# Altium PCB Armado del Programador Xilinx.PcbDoc
Units mm, origin at the board's own origin, x right, y up, seen from the top; angles counter-clockwise.
Board outline 439.29 x 273.69 mm, 2 copper layers (Top Layer, Bottom Layer); 34 components, 31 nets, 132 pads, 0 vias.
Unrouted connection lines stored in the file: 1.
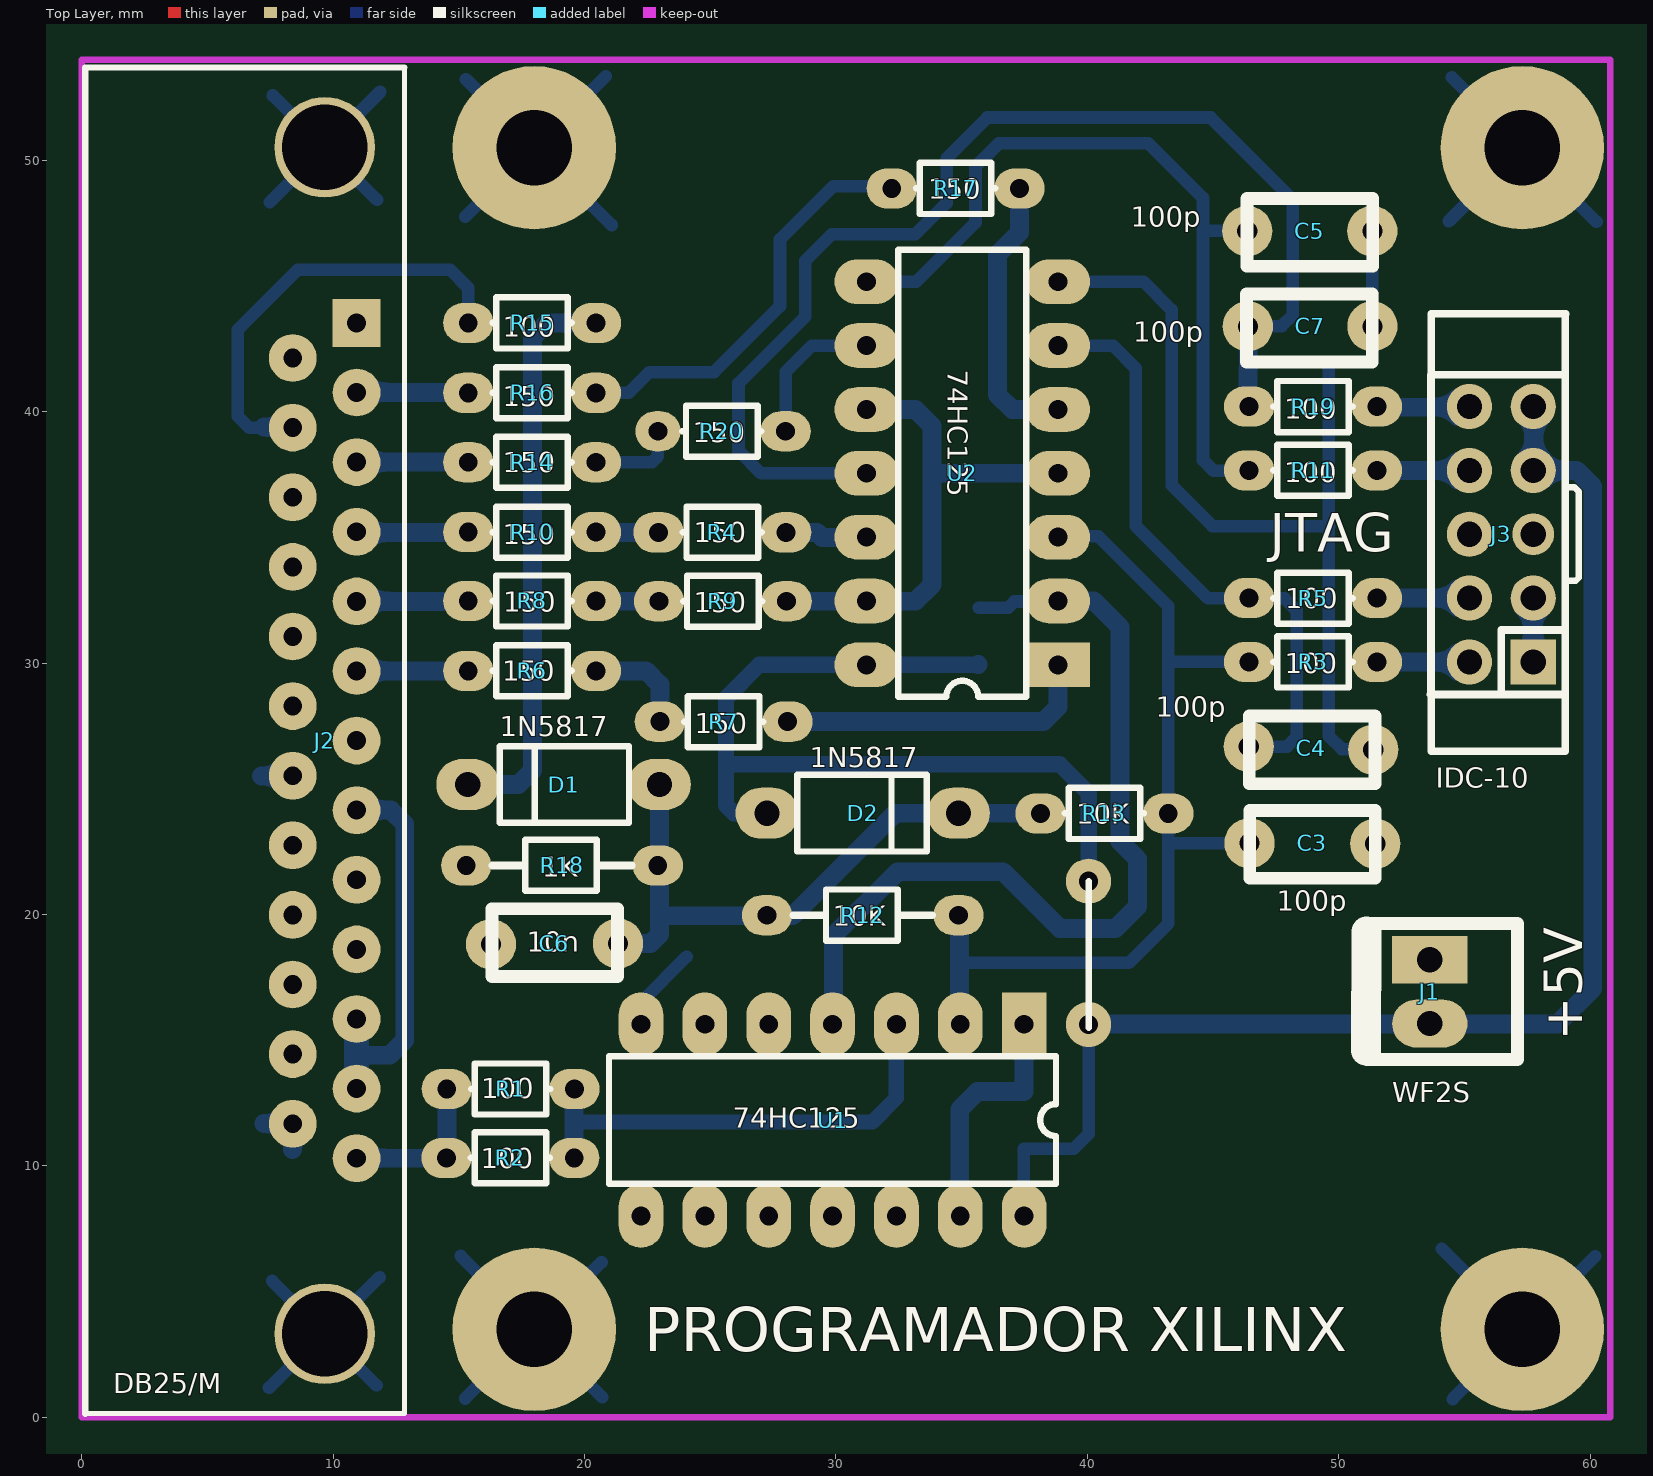
[diagram p0: Top Layer view]
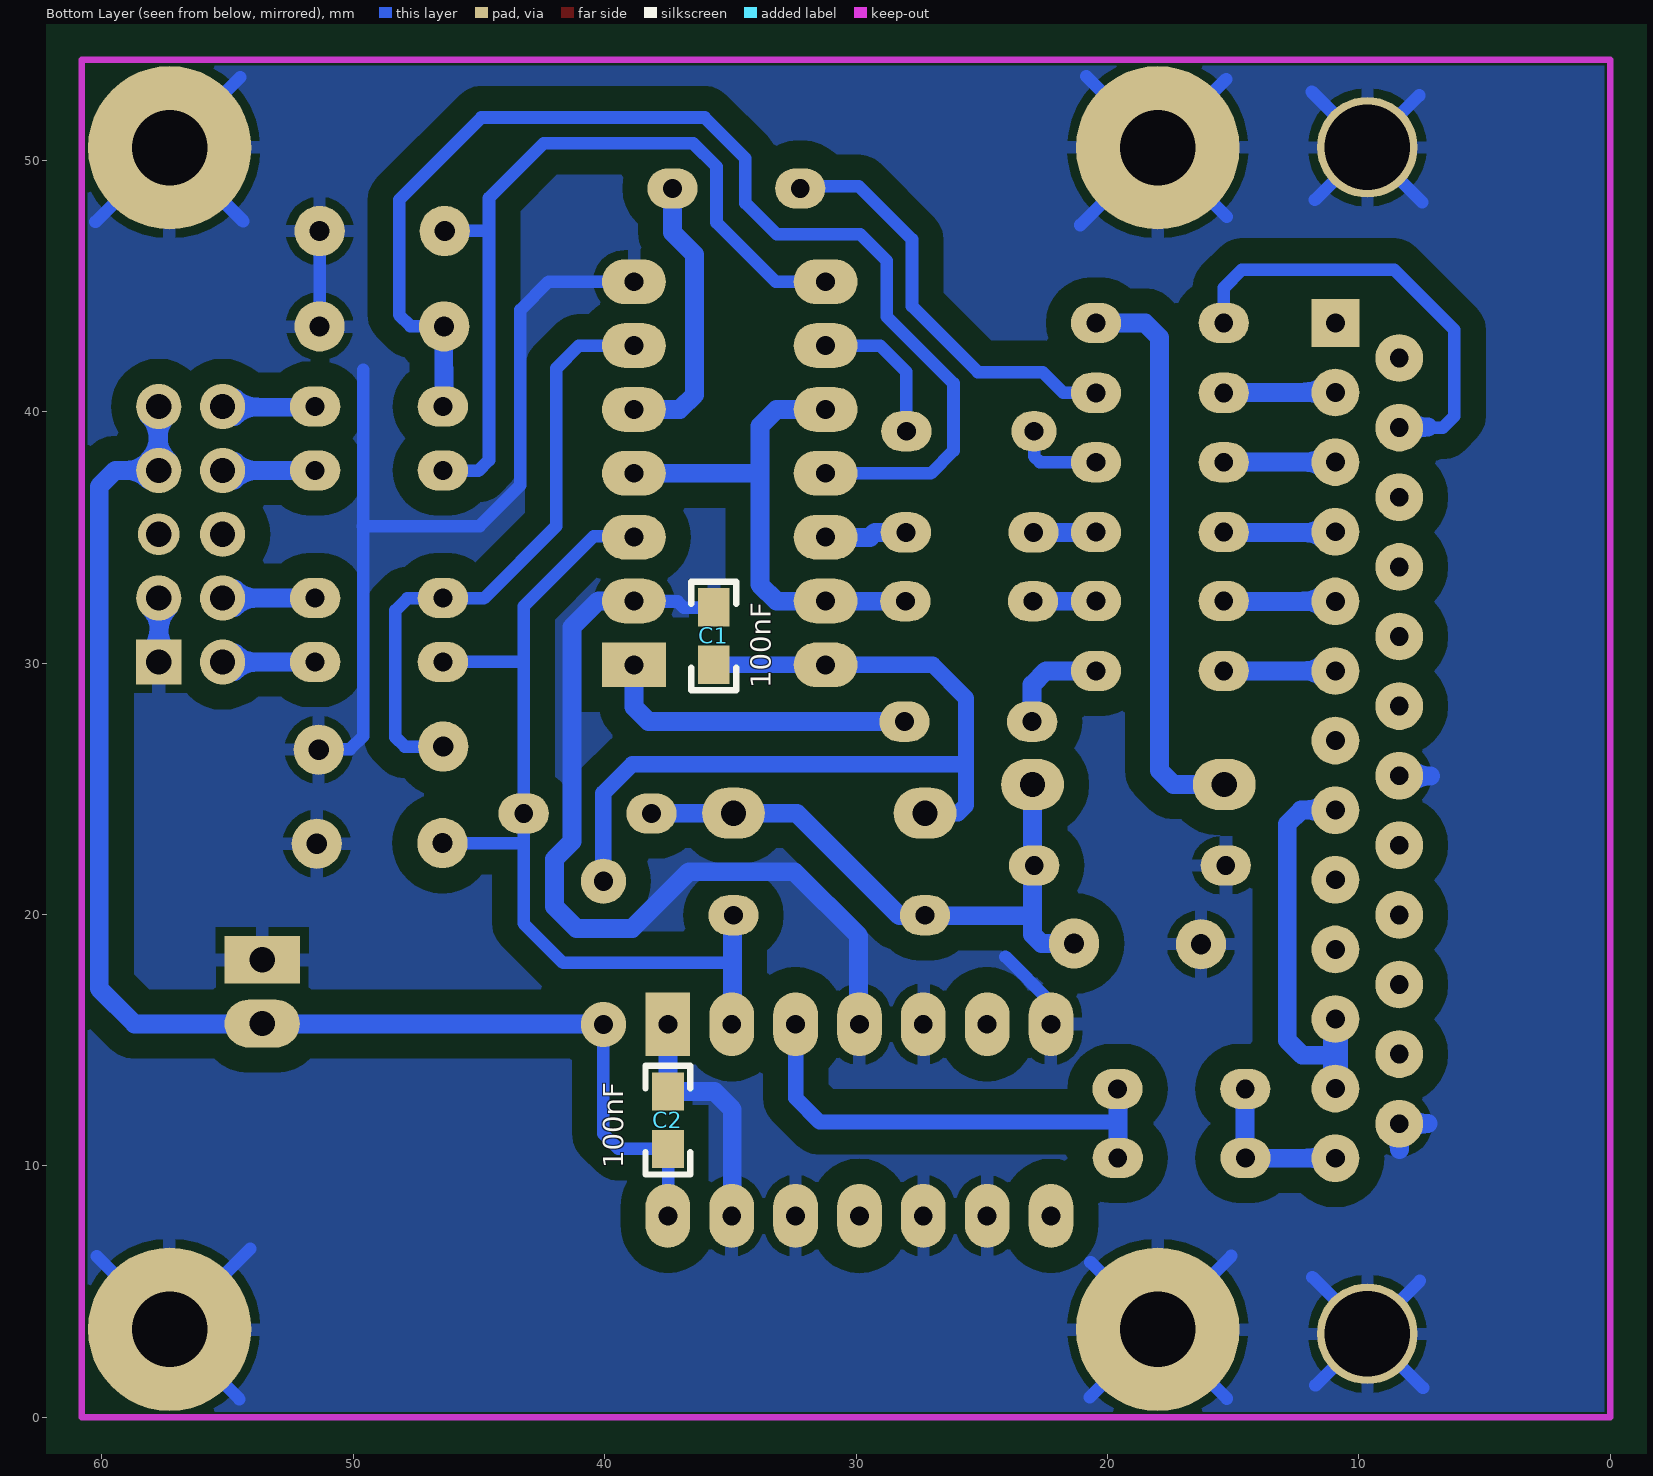
[diagram p1: Bottom Layer view, seen from below]

## Layer stack, top to bottom
Top Layer: signal copper 0.0356
Dielectric: dielectric 0.32, FR-4, Dk 4.8
Bottom Layer: signal copper 0.0356

## Board outline
340.241,178.404 -99.052,178.404 -99.052,-95.281 336.939,-95.281 336.939,178.404

## Design rules (kind name [scope] priority, off if disabled: settings)
Clearance "GND PAD" [InNet('GND') vs InNet('GND')] p1: gap=0.35
Clearance keep [All vs OnLayer('Keep-Out Layer')] p2: gap=0.1
Clearance [All] p3: gap=1
ComponentClearance [All] p1 off: gap=0 collisioncheckmode=3 verticalgap=0
Height [All] p1: minheight=0 maxheight=90 prefheight=12.7
PlaneConnect [All] p1: planeconnectstyle=Direct reliefexpansion=0.508 reliefentries=4 reliefconductorwidth=0.254 reliefairgap=0.254
PolygonConnect [All] p1: connectstyle=Relief reliefconductorwidth=0.5 reliefentries=4 polygonreliefangle="90 Angle"
RoutingVias [All] p1: holewidth=0.711 width=1.27 viastyle="Through Hole" minholewidth=0.711 minwidth=1.27 maxholewidth=0.711 maxwidth=1.27
SolderMaskExpansion [All] p1: expansion=0.102
TestPointUsage [All] p1: valid=0 allowmultiple=FALSE
Testpoint [All] p1: side=15 testpointundercomponent=TRUE minsize=1.016 maxsize=2.54 preferedsize=1.524 minholesize=0 maxholesize=1.016 preferedholesize=0.813 testpointgrid=0.025 style=1023 order=0-112345678
Width [All] p1: maxlimit=5 minlimit=0.254 preferedwidth=0.3 bottomlayer_prefwidth=0.5 minimp=50.000000 maximp=50.000000 favimp=50.000000
15 further rules are at their usual default settings.

## Components (designator, comment, footprint, x,y, rotation, side; value= is the part's Value field where it differs from the comment)
C1 "100nF" 0805 35.66,29.94 r90 bottom locked
C2 "100nF" 0805 37.485,10.675 r90 bottom
C3 "100p" CAP2.54#1 48.955,22.84 r180 top locked
C4 "100p" CAP2.54#2 48.94,26.6 r180 top locked
C5 "100p" CAP2.54#3 48.855,47.18 r180 top locked
C6 "10n" CAP2.54#4 18.815,18.83 r0 top locked
C7 "100p" CAP2.54#5 48.835,43.38 r180 top locked
D1 "1N5817" DO-41_300 22.975,25.17 r180 top locked
D2 "1N5817" DO-41_300 27.255,24.03 r0 top
J1 "WF2S" WF2S 53.62,15.66 r90 top locked
J2 "DB25/M" "DB25 MACHO 90º" 10.935,43.53 r90 top
J3 "IDC-10" IDC10 57.735,30.045 r90 top locked
R1 "100" RES_MF1/2W_200#1 14.52,13.06 r0 top locked
R2 "100" RES_MF1/2W_200#1 14.51,10.32 r0 top locked
R3 "100" RES_MF1/2W_200#1 46.435,30.045 r0 top locked
R4 "150" RES_MF1/2W_200#1 22.94,35.2 r0 top locked
R5 "100" RES_MF1/2W_200#1 46.435,32.585 r0 top locked
R6 "150" RES_MF1/2W_200#1 15.375,29.69 r0 top locked
R7 "150" RES_MF1/2W_200#1 22.995,27.67 r0 top locked
R8 "150" RES_MF1/2W_200#1 15.375,32.47 r0 top locked
R9 "150" RES_MF1/2W_200#1 22.96,32.46 r0 top locked
R10 "150" RES_MF1/2W_200#1 15.375,35.21 r0 top locked
R11 "100" RES_MF1/2W_200#1 46.435,37.665 r0 top locked
R12 "10K" RES_MF1/2W_300 27.255,19.97 r0 top
R13 "10K" RES_MF1/2W_200#1 38.14,24.02 r0 top
R14 "150" RES_MF1/2W_200#1 15.375,37.99 r0 top locked
R15 "100" RES_MF1/2W_200#1 15.375,43.53 r0 top locked
R16 "150" RES_MF1/2W_200#1 15.375,40.75 r0 top locked
R17 "150" RES_MF1/2W_200#1 32.22,48.88 r0 top
R18 "1K" RES_MF1/2W_300 15.295,21.95 r0 top locked
R19 "100" RES_MF1/2W_200#1 46.435,40.205 r0 top locked
R20 "150" RES_MF1/2W_200#2 22.92,39.22 r0 top locked
U1 "74HC125" DIP14 37.485,15.635 r270 top locked
U2 "74HC125" DIP14 38.835,29.93 r180 top locked

## Footprints (in the part's own frame and the unit in brackets; to place one, negate y for a bottom-side part, rotate by r counter-clockwise, add the part's x,y. Pads: shape width x height; smd on the part's side, far side on the other; paste and mask are expansions set on the pad)
0805 [mil]
  rect 60x50 smd: 1(0,0) 2(90,0)
  silkscreen extent -40,-35 130,35
CAP2.54#1 [mm] "CAPACITOR AXIAL 2.54"
  round 2 hole 0.8: 1(-2.495,0.025) 2(2.505,0)
  silkscreen extent -2.5,-1.3 2.5,1.4
CAP2.54#2 [mm] "CAPACITOR AXIAL 2.54"
  round 2 hole 0.8: 1(-2.433,0.045) 2(2.52,-0.082)
  silkscreen extent -2.5,-1.3 2.5,1.4
CAP2.54#3 [mm] "CAPACITOR AXIAL 2.54"
  round 2 hole 0.8: 1(-2.48,-0.005) 2(2.495,-0.005)
  silkscreen extent -2.5,-1.3 2.5,1.4
CAP2.54#4 [mm] "CAPACITOR AXIAL 2.54"
  round 2 hole 0.8: 1(-2.535,-0.011) 2(2.515,0.017)
  silkscreen extent -2.5,-1.3 2.5,1.4
CAP2.54#5 [mm] "CAPACITOR AXIAL 2.54"
  round 2 hole 0.8: 1(-2.503,-0.012) 2(2.45,-0.012)
  silkscreen extent -2.5,-1.3 2.5,1.4
"DB25 MACHO 90º" [mm]
  round 4 hole 3.4: 0(-40.208,1.27) 0(6.985,1.27)
  rect 1.9x1.9 hole 0.75: 1(0,0)
  round 1.9 hole 0.75: 2(-2.769,0) 3(-5.537,0) 4(-8.306,0) 5(-11.074,0) 6(-13.843,0) 7(-16.612,0) 8(-19.38,0) 9(-22.149,0) 10(-24.917,0) 11(-27.686,0) 12(-30.455,0) 13(-33.223,0) 14(-1.397,2.54) 15(-4.166,2.54) 16(-6.934,2.54) 17(-9.703,2.54) 18(-12.471,2.54) 19(-15.24,2.54) 20(-18.009,2.54) 21(-20.777,2.54) 22(-23.546,2.54) 23(-26.314,2.54) 24(-29.083,2.54) 25(-31.852,2.54)
  silkscreen extent -43.38,-1.91 10.16,10.79
DIP14 [mm]
  rect 2.54x1.778 hole 0.75: 1(0,0)
  oval 2.54x1.778 hole 0.75: 2(0,-2.54) 3(0,-5.08) 4(0,-7.62) 5(0,-10.16) 6(0,-12.7) 7(0,-15.24) 8(7.62,-15.24) 9(7.62,-12.7) 10(7.62,-10.16) 11(7.62,-7.62) 12(7.62,-5.08) 13(7.62,-2.54) 14(7.62,0)
  silkscreen extent 1.27,-16.51 6.35,1.27
DO-41_300 [mm]
  oval 2.5x2.032 hole 1: A(0,0) K(7.62,0)
  silkscreen extent 1.21,-1.52 6.35,1.52
IDC10 [mm]
  rect 1.8x1.8 hole 1: 1(0,0)
  round 1.8 hole 1: 2(0,2.54) 3(2.54,0) 4(2.54,2.54) 6(5.08,2.54) 7(7.62,0) 8(7.62,2.54) 9(10.16,0) 10(10.16,2.54)
  round 1.651 hole 1: 5(5.08,0)
  silkscreen extent -3.56,-1.3 13.86,4.09
RES_MF1/2W_200#1 [mm]
  oval 2x1.6 hole 0.75: 1(0,0) 2(5.08,0)
  silkscreen extent 0.97,-1.02 4.11,1.02
RES_MF1/2W_200#2 [mm]
  oval 1.8x1.6 hole 0.75: 1(0,0)
  oval 2x1.6 hole 0.75: 2(5.08,0)
  silkscreen extent 0.97,-1.02 4.11,1.02
RES_MF1/2W_300 [mm]
  oval 2x1.6 hole 0.75: 1(0,0) 2(7.62,0)
  silkscreen extent 1.04,-1.01 6.58,1.02
WF2S [mm]
  rect 1.9x3 hole 1: 1(2.54,0)
  oval 1.9x3 hole 1: 2(0,0)
  silkscreen extent -1.42,-3.49 3.99,2.54

## Part data
C1 C2: library part Cap, "Capacitor"
C3 C4 C5 C7: "CAPACITOR CERAMICO DISCO 2.54 mm  X7R  50V  100pF"
C6: "CAPACITOR CERAMICO DISCO 2.54 mm  X7R  50V  10nF"
D1 D2: library part "1N5817 DO-41", "DIODO SCHOTTKY 1N5817 DO-41"
J1: "WF2S HEADER .100\" RECTO 2 VIAS"
J2: "DB25M CONECTOR D SUBMINIATURA 12 VIAS MACHO CABLE"
J3: library part IDC10, "CONECTOR IDC MACHO PCB NO POLARIZADO PASO 2.54 mm RECTO 2X5 VIAS"
R1 R2 R3 R5 R11 R19: "RESISTOR SMD1206 0.25 W 5%   100 OHMS"
R4 R6 R7 R8 R9 R10 R14 R16 R17: "RESISTOR METAL FILM 0.5 W 5% 150 OHMS"
R12: library part 100, "RESISTOR SMD1206 0.25 W 5%   100 OHMS"
R13: library part 1K0, "RESISTOR SMD1206 0.25 W 5%   1 K OHMS"
R15: "RESISTOR METAL FILM 0.5 W 5% 100 OHMS"
R18: library part 150, "RESISTOR SMD1206 0.25 W 5%   150 OHMS"
R20: library part 10K, "RESISTOR SMD1206 0.25 W 5%   10 K OHMS"
U1 U2: library part "74HC125 DIP", "QUAD 3-STATE NON INVERTING BUFFERS"

## Free pads (board coordinates)
  round 1.2 on Top Overlay: 0(59.925,30.025)
  round 1.8 hole 0.762: 1(40.05,15.625) 1(40.05,21.325)
  round 6.5 hole 3: 20(18,3.5) 20(18,50.5) 21(57.3,50.5) 22(57.3,3.5)

## Nets (pads, with @x,y where several pads share a name; then routed paths per layer and width w, separated by ;. In a path a pad name is that pad's centre, name@x,y a point inside that pad or via, vN(x,y) a via of type N, cw(c..) or ccw(c..) an arc to the next point about the centre after c; other vN are vias at no path point)
GND: C1.2 C2.2 C3.1 C4.1 C5.1 C6.1 C7.1 J1.1 J2.0 J2.20 J2.25 J3.1 J3.3 pad.20 pad.21 pad.22 R18.1 U1.1 U1.4 U1.5 U1.7 U1.9 U1.10 U1.12 U1.13 U2.2 U2.7 | length 182.1
  Bottom Layer w0.5: 7.45,1.175 11.85,5.575 ; 7.475,48.325 11.875,52.725 ; 7.575,5.425 11.725,1.275 ; 7.6,52.575 11.75,48.425 ; 15.075,6.425 20.7,0.8 ; 15.25,0.75 20.675,6.175 ; 15.25,47.75 20.85,53.35 ; 15.275,53.225 21.075,47.425 ; U1.7 22.245,16.509 24.061,18.325 ; C1.2@35.675,32.2 36.85,32.2 37.1,32.45 U2.2@38.825,32.45 ; U1.1 U1.1@37.485,16.485 ; U2.7@38.85,45.175 42.225,45.175 43.35,44.05 43.35,37.075 44.975,35.45 47.25,35.45 49.625,35.45 ; 49.6,41.675 49.6,27.1 50.125,26.575 C4.1@51.35,26.575 ; C7.1@51.325,43.375 C5.1@51.325,47.15 ; 54.1,6.7 pad.22 ; 54.375,47.575 pad.21 ; 54.5,53.3 60.25,47.55 ; 54.525,0.725 60.2,6.4 ; J3.1@57.735,30.06 J3.3
  Bottom Layer w0.75: J2.25@8.019,11.549 cw(c7.123,10.653) 8.39,10.653 cw(c9.657,10.653) J2.25@8.761,11.549 ; J2.20@8.049,25.139 ccw(c7.153,24.243) 7.153,25.51 ccw(c7.153,26.777) J2.20@8.049,25.881 ; J2.25@8.149,11.314 ccw(c7.253,10.418) 7.253,11.685 ccw(c7.253,12.952) J2.25@8.149,12.056 ; U1.4@29.9,15.625 29.9,19.15 32.45,21.7 36.65,21.7 38.9,19.45 41.125,19.45 42,20.325 42,22.2 41.3,22.9 41.3,31.425 40.25,32.475 U2.2@38.825,32.475 ; U1.13@34.925,8 34.925,12.25 35.636,12.961 C2.2 U1.1@37.485,15.615 ; U2.2@38.825,32.45 U2.2@38.835,32.45 ; C4.1@51.35,26.555 C4.1@51.368,26.555 ; C7.1@51.35,43.375 C7.1@51.375,43.4 ; J3.3@57.344,32.199 cw(c56.448,31.303) 57.715,31.303 cw(c58.982,31.303) J3.3@58.086,32.199 ; J3.1@57.364,30.451 ccw(c56.468,31.347) 57.735,31.347 ccw(c59.002,31.347) J3.1@58.106,30.451
NetC3_2: C3.2 R3.1 R12.2 R13.2 U1.2 U2.3 | length 36.9
  Bottom Layer w0.5: 34.925,18.075 41.65,18.075 43.225,19.65 43.225,32.25 40.425,35.05 U2.3@39.9,35.05 ; 43.21,22.84 C3.2 ; 43.23,30.045 R3.1
  Bottom Layer w0.75: U1.2@34.92,15.61 R12.2@34.92,19.995
NetC4_2: C4.2 R5.1 U2.6 | length 24.7
  Bottom Layer w0.5: U2.6@38.825,42.625 41.025,42.625 41.925,41.725 41.925,35.45 44.8,32.575 47.85,32.575 48.325,32.1 48.325,27.05 47.95,26.675 C4.2@46.4,26.675
NetC5_2: C5.2 R11.1 U2.8 | length 32.1
  Bottom Layer w0.5: U2.8 33.195,45.17 35.55,47.525 35.55,49.75 36.475,50.675 42.425,50.675 44.6,48.5 44.6,38.075 45.025,37.65 R11.1@46.425,37.65 ; 44.6,47.2 C5.2@46.35,47.2
  Bottom Layer w0.75: U2.8@31.215,45.15 U2.8@31.225,45.15
NetC6_2: C6.2 D1.A D2.K R12.1 R13.1 R18.2 | length 25.1
  Bottom Layer w0.75: C6.2@21.325,18.85 22.625,18.85 22.975,19.2 D1.A ; 22.975,19.95 24.725,19.95 28.275,19.95 32.35,24.025 R13.1@38.6,24.025
NetC7_2: C7.2 R19.1 U2.11 | length 48.1
  Bottom Layer w0.5: U2.11@31.225,37.55 27.025,37.55 26.125,38.45 26.125,41.125 28.775,43.775 28.775,46 29.825,47.05 33.15,47.05 34.4,48.3 34.4,50.075 36.025,51.7 44.9,51.7 48.175,48.425 48.175,43.85 47.725,43.4 C7.2@46.4,43.4
  Bottom Layer w0.75: U2.11 U2.11@31.225,37.55 ; C7.2@46.375,43.4 C7.2@46.4,43.4 ; R19.1@46.385,40.215 46.4,43.392 C7.2@46.4,43.4 ; C7.2@46.4,43.425 C7.2@46.4,43.4
NetD1_K: D1.K R15.2 | length 22.8
  Bottom Layer w0.75: D1.K@15.325,25.15 D1.K@15.355,25.15 ; D1.K 17.37,25.17 17.925,25.725 17.925,42.95 18.5,43.525 R15.2@20.425,43.525
NetJ2_2: J2.2 R16.1 | length 6.4
  Bottom Layer w0.75: J2.2 R16.1@15.386,40.761 ; J2.2@11.251,40.419 cw(c12.147,39.523) 12.147,40.79 cw(c12.147,42.057) J2.2@11.251,41.161
NetJ2_3: J2.3 R14.1 | length 6.4
  Bottom Layer w0.75: J2.3 R14.1@15.357,37.993 ; J2.3@11.276,37.619 cw(c12.172,36.723) 12.172,37.99 cw(c12.172,39.257) J2.3@11.276,38.361
NetJ2_4: J2.4 R10.1 | length 6.4
  Bottom Layer w0.75: J2.4@10.925,35.2 R10.1@15.35,35.2 ; J2.4@11.276,34.819 cw(c12.172,33.923) 12.172,35.19 cw(c12.172,36.457) J2.4@11.276,35.561
NetJ2_5: J2.5 R8.1 | length 6.4
  Bottom Layer w0.75: J2.5 R8.1@15.356,32.456 ; J2.5@11.301,32.094 cw(c12.197,31.198) 12.197,32.465 cw(c12.197,33.732) J2.5@11.301,32.836
NetJ2_6: J2.6 R6.1 | length 6.4
  Bottom Layer w0.75: J2.6 R6.1@15.388,29.687 ; J2.6@11.301,29.319 cw(c12.197,28.423) 12.197,29.69 cw(c12.197,30.957) J2.6@11.301,30.061
NetJ2_8: J2.8 J2.11 J2.12 | length 21.7
  Bottom Layer w0.75: J2.12@10.564,13.301 ccw(c9.668,14.197) 10.935,14.197 ccw(c12.202,14.197) J2.12@11.306,13.301 ; J2.11@10.569,15.649 cw(c9.673,14.753) 10.94,14.753 cw(c12.207,14.753) J2.11@11.311,15.649 ; 10.925,14.4 12.25,14.4 12.85,15 12.85,23.6 12.3,24.15 J2.8@10.925,24.15 ; J2.8@11.226,23.794 cw(c12.122,22.898) 12.122,24.165 cw(c12.122,25.432) J2.8@11.226,24.536
  Bottom Layer w1: J2.12 J2.11@10.935,15.84
NetJ2_13: J2.13 R1.1 R2.1 | length 8.3
  Bottom Layer w0.75: J2.13 R2.1@14.532,10.307 ; J2.13@11.151,9.944 cw(c12.047,9.048) 12.047,10.315 cw(c12.047,11.582) J2.13@11.151,10.686 ; R2.1@14.525,10.3 R1.1@14.525,13.025
NetJ2_15: J2.15 R15.1 | length 19.7
  Bottom Layer w0.5: J2.15 6.661,39.364 6.2,39.825 6.2,43.25 8.6,45.65 14.65,45.65 15.375,44.925 R15.1
  Bottom Layer w0.75: J2.15@8.149,39.014 ccw(c7.253,38.118) 7.253,39.385 ccw(c7.253,40.652) J2.15@8.149,39.756 ; R15.1@15.375,43.5 R15.1
NetJ3_2: J3.2 R3.2 | length 5.7
  Bottom Layer w0.75: R3.2 J3.2@55.22,30.045 ; J3.2@54.724,29.664 ccw(c53.828,28.768) 53.828,30.035 ccw(c53.828,31.302) J3.2@54.724,30.406
NetJ3_4: J3.4 R5.2 | length 5.6
  Bottom Layer w0.75: R5.2 J3.4@55.165,32.585 ; J3.4@54.724,32.214 ccw(c53.828,31.318) 53.828,32.585 ccw(c53.828,33.852) J3.4@54.724,32.956
NetJ3_8: J3.8 R11.2 | length 5.7
  Bottom Layer w0.75: R11.2 J3.8@55.24,37.665 ; J3.8@54.724,37.289 ccw(c53.828,36.393) 53.828,37.66 ccw(c53.828,38.927) J3.8@54.724,38.031
NetJ3_10: J3.10 R19.2 | length 5.7
  Bottom Layer w0.75: R19.2@51.475,40.175 J3.10@55.225,40.175 ; J3.10@54.724,39.814 ccw(c53.828,38.918) 53.828,40.185 ccw(c53.828,41.452) J3.10@54.724,40.556
NetR1_2: R1.2 R2.2 U1.3 | length 18.9
  Bottom Layer w0.6: 19.575,11.75 31.45,11.75 32.4,12.7 U1.3@32.4,15.625
  Bottom Layer w0.75: R2.2@19.575,10.325 R1.2@19.575,13.075 ; U1.3@32.405,15.625 U1.3
NetR4_1: R4.1 R10.2 | length 2.5
  Bottom Layer w0.75: R10.2@20.4,35.2 R4.1
NetR4_2: R4.2 U2.12 | length 3.3
  Bottom Layer w0.75: R4.2 29.25,35.2 29.45,35 U2.12@31.225,35
NetR6_2: R6.2 R7.1 | length 4.3
  Bottom Layer w0.75: R6.2@20.425,29.65 R6.2@20.455,29.65 ; R6.2 22.45,29.69 22.995,29.145 R7.1 ; R7.1@23,27.65 R7.1@23,27.67
NetR7_2: R7.2 U2.1 | length 12.7
  Bottom Layer w0.75: R7.2@28.05,27.675 38.25,27.675 38.835,28.26 U2.1
NetR8_2: R8.2 R9.1 | length 2.5
  Bottom Layer w0.75: R8.2@20.465,32.46 R9.1
NetR9_2: R9.2 U2.4 U2.10 U2.13 | length 20.2
  Bottom Layer w0.75: R9.2 33.16,32.46 33.825,33.125 33.825,35.925 33.825,39.425 33.16,40.09 U2.10 ; 33.9,37.55 U2.4
NetR14_2: R14.2 R20.1 | length 3.6
  Bottom Layer w0.5: R14.2 22.69,37.99 22.92,38.22 R20.1
NetR16_2: R16.2 R17.1 | length 15.8
  Bottom Layer w0.5: R16.2 21.755,40.75 22.58,41.575 25.15,41.575 27.775,44.2 27.775,46.85 29.895,48.97 31.195,48.97
  Bottom Layer w0.6: R16.2@20.4,40.8 R16.2@20.455,40.8
  Bottom Layer w0.75: R16.2@20.425,40.75 R16.2
NetR17_2: R17.2 U2.5 | length 11.2
  Bottom Layer w0.75: R17.2 37.3,47.125 36.425,46.25 36.425,40.675 37.01,40.09 U2.5
NetR20_2: R20.2 U2.9 | length 6.4
  Bottom Layer w0.5: R20.2@28.064,39.284 R20.2 28,41.586 29.044,42.63 U2.9
  Bottom Layer w0.75: R20.2@27.95,38.9 R20.2@27.95,39.22
VCC: C1.1 C2.1 D2.A J1.2 J3.7 J3.9 pad.1 U1.14 U2.14 | length 96.7
  Bottom Layer w0.5: U1.14@37.475,7.975 37.475,10.675 39.45,10.675 40.05,11.275 pad.1@40.05,15.625
  Bottom Layer w0.65: 25.65,25.975 38.9,25.975 40.05,24.825 pad.1@40.05,21.325 ; D2.A 25.945,24.03 25.625,24.35 25.625,28.6 26.955,29.93 C1.1@35.65,29.93
  Bottom Layer w0.75: C1.1@35.65,29.94 C1.1 ; pad.1@40.05,15.625 pad.1@40.07,15.625 ; pad.1@40.07,15.645 58.695,15.645 60.1,17.05 60.1,37.025 59.46,37.665 J3.7 ; J3.7@57.389,38.076 ccw(c56.493,38.972) 57.76,38.972 ccw(c59.027,38.972) J3.7@58.131,38.076 ; J3.9@57.394,39.849 cw(c56.498,38.953) 57.765,38.953 cw(c59.032,38.953) J3.9@58.136,39.849 ; J3.7@57.75,37.625 J3.9@57.75,40.25 ; J3.7@58.151,37.294 cw(c59.047,36.398) 59.047,37.665 cw(c59.047,38.932) J3.7@58.151,38.036
pads on no net: J2.1 J2.7 J2.9 J2.10 J2.14 J2.16 J2.17 J2.18 J2.19 J2.21 J2.22 J2.23 J2.24 J3.5 J3.6 U1.6 U1.8 U1.11

## Polygon pours and split planes (outlines as drawn)
GND on Bottom Layer (solid, remove dead copper): 0.024,54 60.8,54 60.8,0 0,0 0,54

## Keep-outs
Keep-Out Layer:
  lines w0.254: 60.8,0 0,0 0,54 60.8,54 60.8,0.025

## Silkscreen, mask and mechanical layers (free items; w line width, h text height)
Top Overlay:
  lines w0.254: 40.05,15.5 40.05,21.325 ; 59,37 59.375,37 59.55,36.825 59.55,33.4 59.425,33.275 59.025,33.275
  text "JTAG" at 47.25,34.425 h1.52
  text "+5V" at 59.675,14.975 h1.52 r90
  text "PROGRAMADOR XILINX" at 22.375,2.625 h1.75